# EAGLE board DeviceDOut8 (EAGLE 5.00)
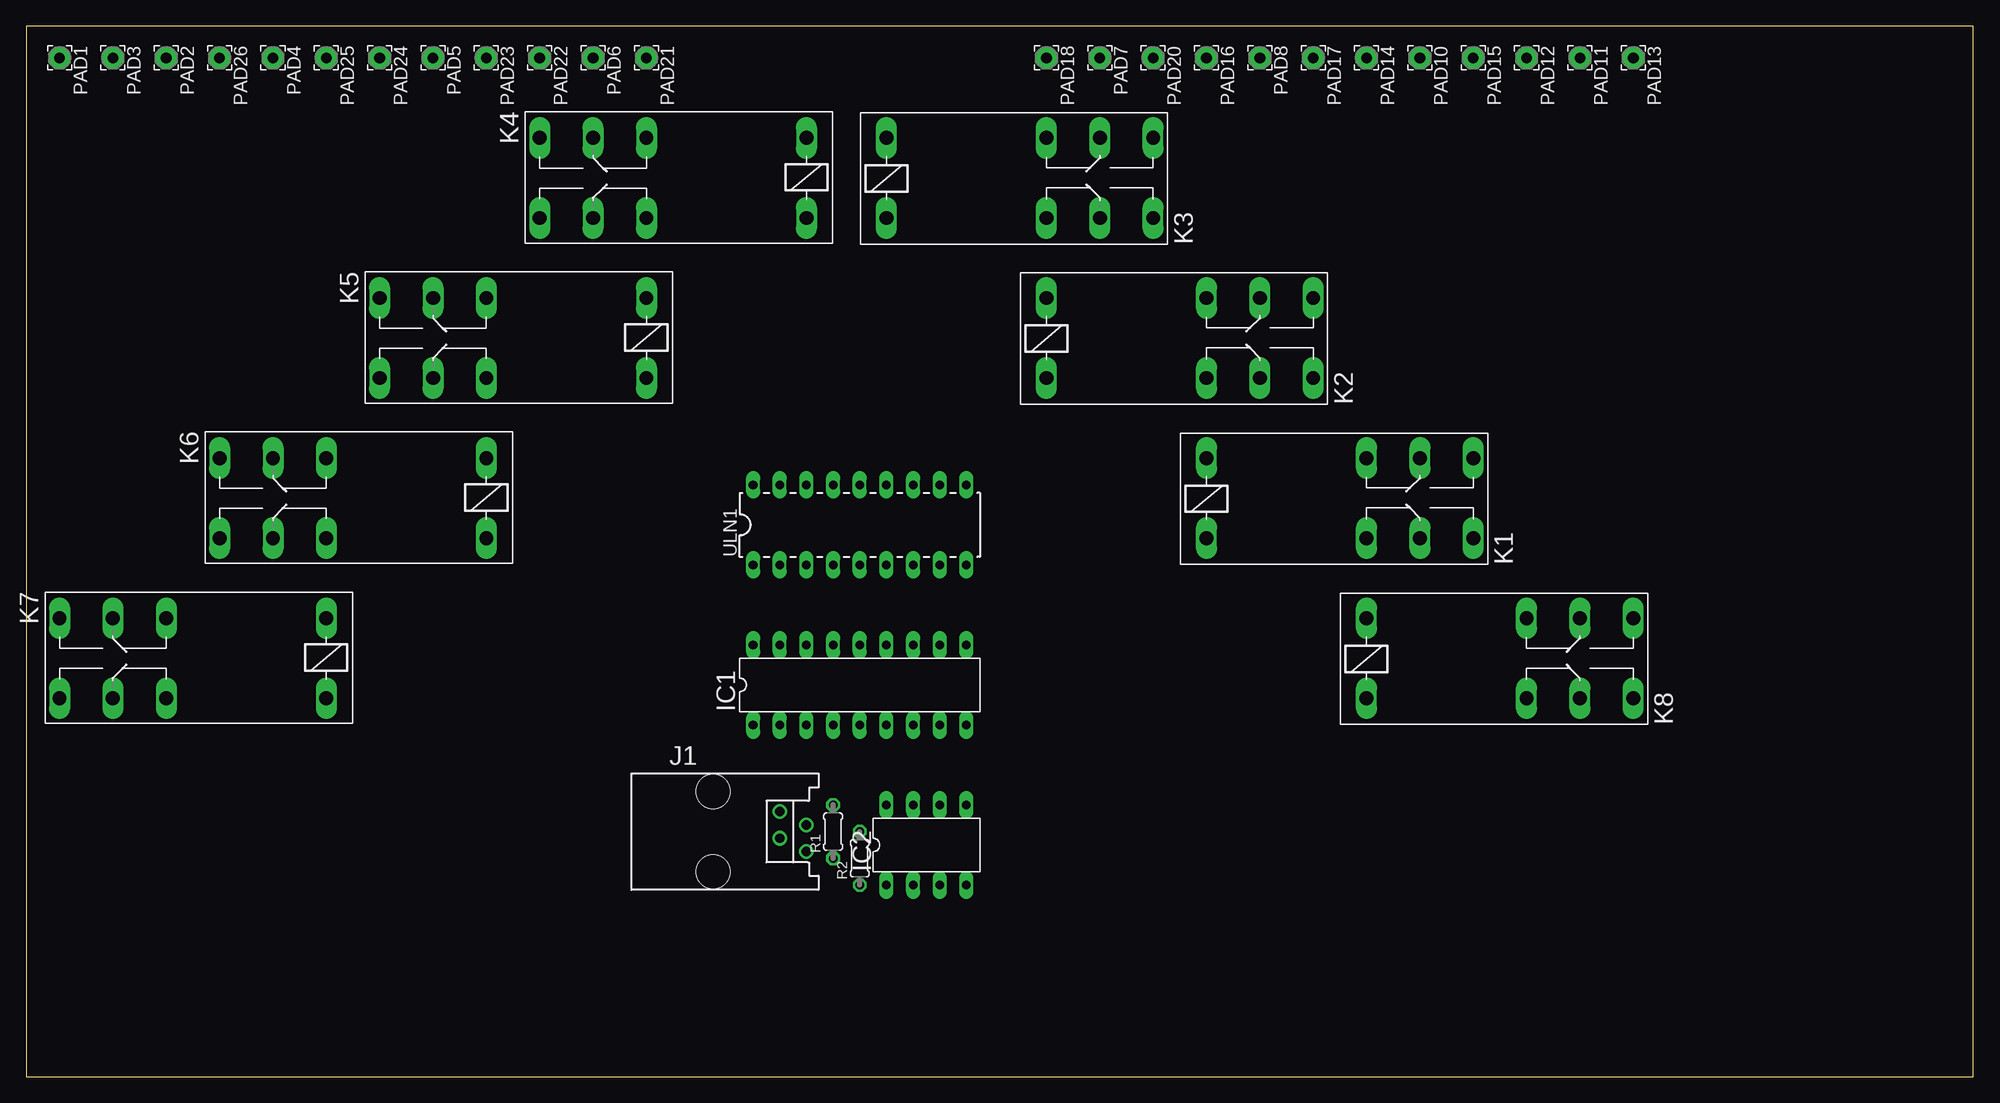
[diagram p0: board, top side]
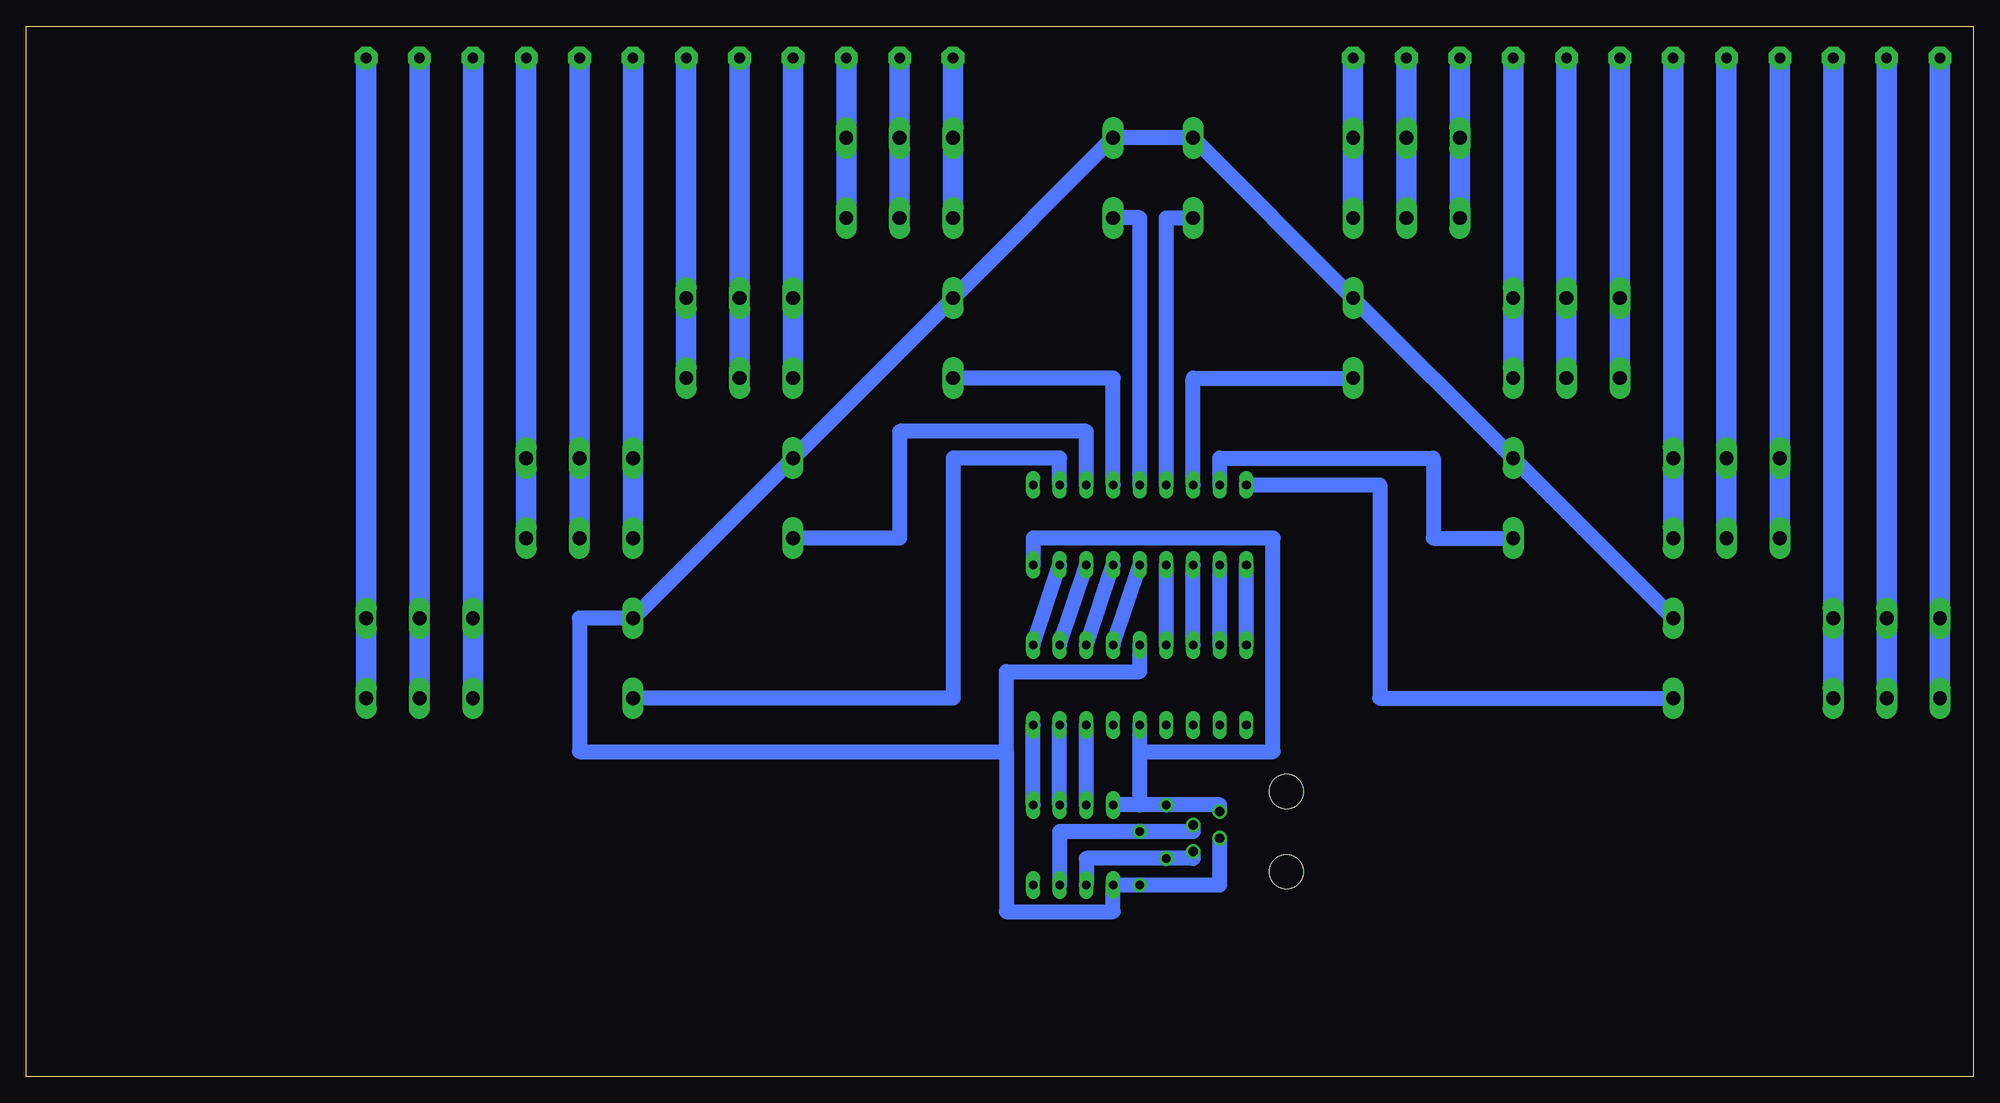
[diagram p1: board, bottom side, seen from below]

Size 185.4 x 100 mm. Coordinates in mm from the lower left corner, seen from the top.
Outline: 0,0 185.4,0 185.4,100 0,100 0,0
Copper layers (1*16): Top 0.035mm / dielectric 1.5mm / Bottom 0.035mm
Design rules "default": minimum track width 10mil, minimum drill 24mil, track to track 8mil, track to pad 8mil, pad to pad 8mil, via to via 8mil, smd to smd 8mil, copper to edge 40mil, drill to drill 8mil, minimum pad ring 10mil, minimum via ring 8mil, stop-mask expansion 4mil, vias tented up to drill 0mil, thermal gap 10mil

## Footprints (pad centres in the part's own frame; a part is rotated, then mirrored left to right if it is on the bottom)
DIL18 = drill 0.813 long: 1 -10.16,-3.81; 2 -7.62,-3.81; 3 -5.08,-3.81; 4 -2.54,-3.81; 5 0,-3.81; 6 2.54,-3.81; 7 5.08,-3.81; 8 7.62,-3.81; 9 10.16,-3.81; 10 10.16,3.81; 11 7.62,3.81; 12 5.08,3.81; 13 2.54,3.81; 14 0,3.81; 15 -2.54,3.81; 16 -5.08,3.81; 17 -7.62,3.81; 18 -10.16,3.81
DIL8 = drill 0.813 long: 1 -3.81,-3.81; 2 -1.27,-3.81; 3 1.27,-3.81; 4 3.81,-3.81; 5 3.81,3.81; 6 1.27,3.81; 7 -1.27,3.81; 8 -3.81,3.81
215875-3 = drill 0.889 round: 1 -1.905,6.35; 2 -0.635,8.89; 3 0.635,6.35; 4 1.905,8.89 | hole 3.251: -3.81,0; 3.81,0
F4052 = drill 1.321 long: 1 -3.81,3.81; 2 -3.81,-3.81; O1 11.43,-3.81; O2 11.43,3.81; P1 16.51,-3.81; P2 16.51,3.81; S1 21.59,-3.81; S2 21.59,3.81
2,15/1,0 = drill 1.016 pad 2.159 octagon: 1 0,0
0204/5 = drill 0.813 octagon: 1 -2.54,0; 2 2.54,0

## Placement (x,y rotation side)
IC1  PIC16F628P  [DIL18]  79.37,37.3 0 top
IC2  PIC12F629P  [DIL8]  85.72,22.06 0 top
J1  [215875-3]  65.4,23.33 270 top
K1  4052  [F4052]  116.2,55.08 0 top
K2  4052  [F4052]  100.96,70.32 0 top
K3  4052  [F4052]  85.72,85.56 0 top
K4  4052  [F4052]  70.48,85.56 180 top
K5  4052  [F4052]  55.24,70.32 180 top
K6  4052  [F4052]  40,55.08 180 top
K7  4052  [F4052]  24.76,39.84 180 top
K8  4052  [F4052]  131.44,39.84 0 top
PAD1  [2,15/1,0]  3.17,96.99 270 top
PAD2  [2,15/1,0]  13.33,96.99 270 top
PAD3  [2,15/1,0]  8.25,96.99 270 top
PAD4  [2,15/1,0]  23.49,96.99 270 top
PAD5  [2,15/1,0]  38.73,96.99 270 top
PAD6  [2,15/1,0]  53.97,96.99 270 top
PAD7  [2,15/1,0]  102.23,96.99 270 top
PAD8  [2,15/1,0]  117.47,96.99 270 top
PAD10  [2,15/1,0]  132.71,96.99 270 top
PAD11  [2,15/1,0]  147.95,96.99 270 top
PAD12  [2,15/1,0]  142.87,96.99 270 top
PAD13  [2,15/1,0]  153.03,96.99 270 top
PAD14  [2,15/1,0]  127.63,96.99 270 top
PAD15  [2,15/1,0]  137.79,96.99 270 top
PAD16  [2,15/1,0]  112.39,96.99 270 top
PAD17  [2,15/1,0]  122.55,96.99 270 top
PAD18  [2,15/1,0]  97.15,96.99 270 top
PAD20  [2,15/1,0]  107.31,96.99 270 top
PAD21  [2,15/1,0]  59.05,96.99 270 top
PAD22  [2,15/1,0]  48.89,96.99 270 top
PAD23  [2,15/1,0]  43.81,96.99 270 top
PAD24  [2,15/1,0]  33.65,96.99 270 top
PAD25  [2,15/1,0]  28.57,96.99 270 top
PAD26  [2,15/1,0]  18.41,96.99 270 top
R1  [0204/5]  76.83,23.33 90 top
R2  [0204/5]  79.37,20.79 90 top
ULN1  [DIL18]  79.37,52.54 0 top

## Library data of the parts
IC1 IC2 = microchip
J1 = con-amp
K1-K8 = relay
PAD1-PAD8 PAD10-PAD18 PAD20-PAD26 = wirepad
R1 R2 = resistor
ULN1 = SparkFun

## Nets
5V: IC1.14 IC2.1 J1.3 K1.1 K2.1 K3.1 K4.2 K5.2 K6.2 K7.2 K8.1 R2.1
GND: IC1.5 IC2.8 J1.1 R1.2 ULN1.9
N$1: K8.2 ULN1.11
N$2: K1.2 ULN1.12
N$3: K2.2 ULN1.13
N$4: K3.2 ULN1.14
N$5: K4.1 ULN1.15
N$6: K5.1 ULN1.16
N$7: K6.1 ULN1.17
N$8: K7.S1 K7.S2 PAD1.1
N$9: K7.O1 K7.O2 PAD2.1
N$10: IC1.18 ULN1.1
N$11: IC2.3 J1.2 R2.2
N$12: IC1.17 ULN1.2
N$13: IC1.16 ULN1.3
N$14: IC1.15 ULN1.4
N$15: IC1.13 ULN1.5
N$16: IC1.12 ULN1.6
N$17: IC1.11 ULN1.7
N$18: IC1.10 ULN1.8
N$19: K7.P1 K7.P2 PAD3.1
N$20: IC1.7 IC2.7
N$21: IC1.8 IC2.6
N$22: IC1.9 IC2.5
N$23: K6.P1 K6.P2 PAD4.1
N$24: K7.1 ULN1.18
N$25: IC2.2 J1.4 R1.1
N$26: K5.P1 K5.P2 PAD5.1
N$27: K4.P1 K4.P2 PAD6.1
N$28: K2.P1 K2.P2 PAD8.1
N$29: K1.P1 K1.P2 PAD10.1
N$30: K8.P1 K8.P2 PAD11.1
N$31: K8.O1 K8.O2 PAD12.1
N$32: K8.S1 K8.S2 PAD13.1
N$33: K1.S1 K1.S2 PAD15.1
N$34: K2.O1 K2.O2 PAD16.1
N$35: K2.S1 K2.S2 PAD17.1
N$36: K3.O1 K3.O2 PAD18.1
N$37: K3.S1 K3.S2 PAD20.1
N$38: K6.O1 K6.O2 PAD25.1
N$39: K6.S1 K6.S2 PAD26.1
N$40: K1.O1 K1.O2 PAD14.1
N$41: K4.O1 K4.O2 PAD21.1
N$42: K4.S1 K4.S2 PAD22.1
N$43: K5.O1 K5.O2 PAD23.1
N$44: K5.S1 K5.S2 PAD24.1
N$45: K3.P1 K3.P2 PAD7.1

## Tracks (layer width: path | path; a pad name or v marks a point on that pad's centre or on a via)
5V
  Bottom 1.422: J1.3 71.75,18.25 R2.1 IC2.1 81.91,15.71 92.07,15.71 92.07,30.95 | IC1.14 79.37,38.57 92.07,38.57 92.07,30.95 | K7.2 K6.2 K5.2 K4.2 K3.1 K2.1 K1.1 K8.1 132.71,43.65 132.71,30.95 92.07,30.95
GND
  Bottom 1.422: J1.1 71.75,25.87 R1.2 79.37,25.87 | 79.37,25.87 IC2.8 | 79.37,25.87 79.37,30.95 | 79.37,30.95 IC1.5 | 79.37,30.95 66.67,30.95 66.67,51.27 89.53,51.27 ULN1.9
N$1
  Bottom 1.422: ULN1.11 86.99,58.89 97.15,58.89 97.15,36.03 K8.2
N$2
  Bottom 1.422: ULN1.12 84.45,61.43 102.23,61.43 102.23,51.27 K1.2
N$3
  Bottom 1.422: ULN1.13 81.91,66.51 K2.2
N$4
  Bottom 1.422: ULN1.14 79.37,81.75 K3.2
N$5
  Bottom 1.422: ULN1.15 76.83,81.75 K4.1
N$6
  Bottom 1.422: ULN1.16 74.29,66.51 K5.1
N$7
  Bottom 1.422: ULN1.17 71.75,58.89 51.43,58.89 51.43,51.27 K6.1
N$8
  Bottom 1.93: K7.S2 K7.S1 PAD1.1
N$9
  Bottom 1.93: K7.O2 K7.O1 PAD2.1
N$10
  Bottom 1.422: IC1.18 ULN1.1
N$11
  Bottom 1.422: J1.2 74.29,23.33 R2.2 86.99,23.33 IC2.3
N$12
  Bottom 1.422: IC1.17 ULN1.2
N$13
  Bottom 1.422: IC1.16 ULN1.3
N$14
  Bottom 1.422: IC1.15 ULN1.4
N$15
  Bottom 1.422: IC1.13 ULN1.5
N$16
  Bottom 1.422: IC1.12 ULN1.6
N$17
  Bottom 1.422: IC1.11 ULN1.7
N$18
  Bottom 1.422: IC1.10 ULN1.8
N$19
  Bottom 1.93: K7.P2 K7.P1 PAD3.1
N$20
  Bottom 1.422: IC2.7 IC1.7
N$21
  Bottom 1.422: IC2.6 IC1.8
N$22
  Bottom 1.422: IC2.5 IC1.9
N$23
  Bottom 1.93: K6.P2 K6.P1 PAD4.1
N$24
  Bottom 1.422: ULN1.18 56.51,56.35 56.51,36.03 K7.1
N$25
  Bottom 1.422: J1.4 74.29,20.79 R1.1 84.45,20.79 IC2.2
N$26
  Bottom 1.93: K5.P2 K5.P1 PAD5.1
N$27
  Bottom 1.93: K4.P2 K4.P1 PAD6.1
N$28
  Bottom 1.93: K2.P1 K2.P2 PAD8.1
N$29
  Bottom 1.93: K1.P1 K1.P2 PAD10.1
N$30
  Bottom 1.93: K8.P1 K8.P2 PAD11.1
N$31
  Bottom 1.93: K8.O1 K8.O2 PAD12.1
N$32
  Bottom 1.93: K8.S1 K8.S2 PAD13.1
N$33
  Bottom 1.93: K1.S1 K1.S2 PAD15.1
N$34
  Bottom 1.93: K2.O1 K2.O2 PAD16.1
N$35
  Bottom 1.93: K2.S1 K2.S2 PAD17.1
N$36
  Bottom 1.93: K3.O1 K3.O2 PAD18.1
N$37
  Bottom 1.93: K3.S1 K3.S2 PAD20.1
N$38
  Bottom 1.93: K6.O2 K6.O1 PAD25.1
N$39
  Bottom 1.93: K6.S2 K6.S1 PAD26.1
N$40
  Bottom 1.93: K1.O1 K1.O2 PAD14.1
N$41
  Bottom 1.93: K4.O2 K4.O1 PAD21.1
N$42
  Bottom 1.93: K4.S2 K4.S1 PAD22.1
N$43
  Bottom 1.93: K5.O2 K5.O1 PAD23.1
N$44
  Bottom 1.93: K5.S2 K5.S1 PAD24.1
N$45
  Bottom 1.93: K3.P1 K3.P2 PAD7.1